# Altium PCB PCA_0008_USB_REV_B.PcbDoc
Units mm, origin at the board's own origin, x right, y up, seen from the top; angles counter-clockwise.
Board outline 15 x 21 mm, 2 copper layers (Top Layer, Bottom Layer), stack 1.671 mm thick; 9 components, 9 nets, 32 pads, 5 vias.
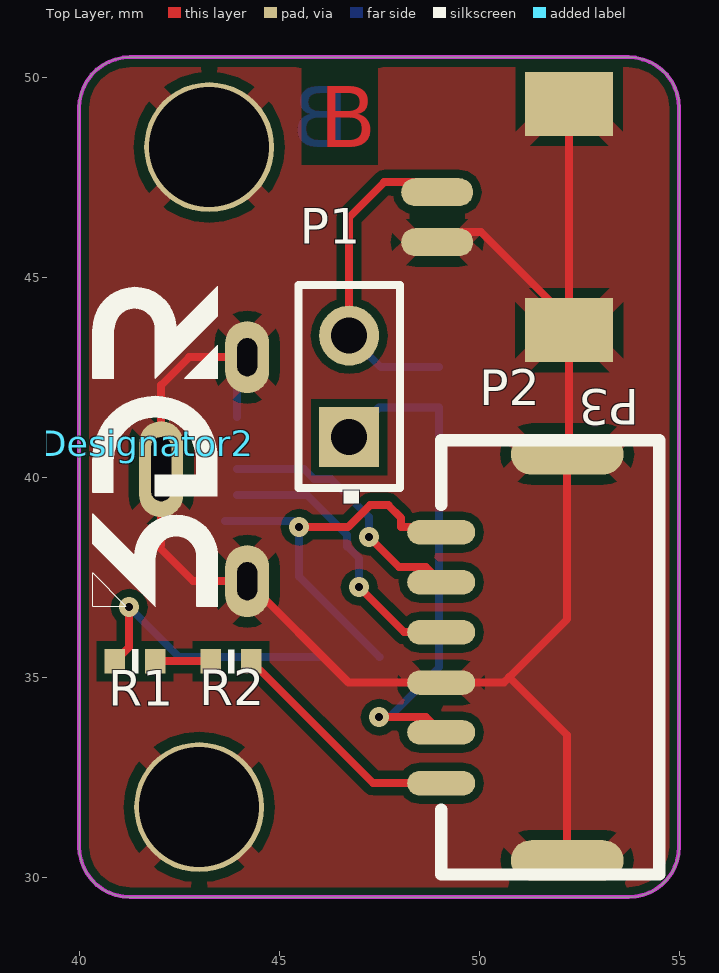
[diagram p0: Top Layer view]
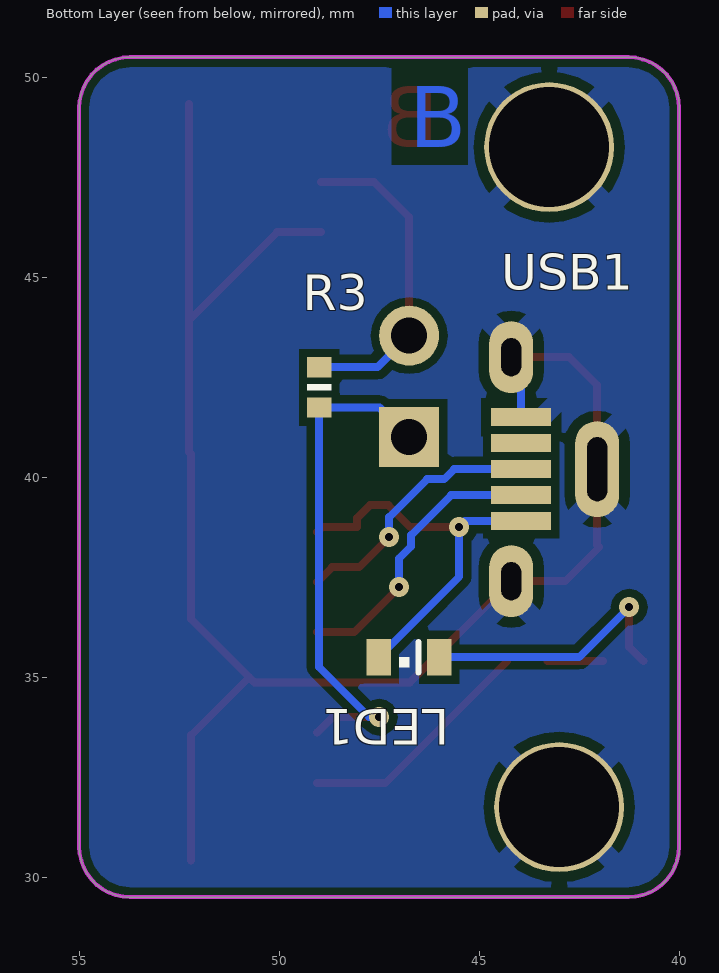
[diagram p1: Bottom Layer view, seen from below]
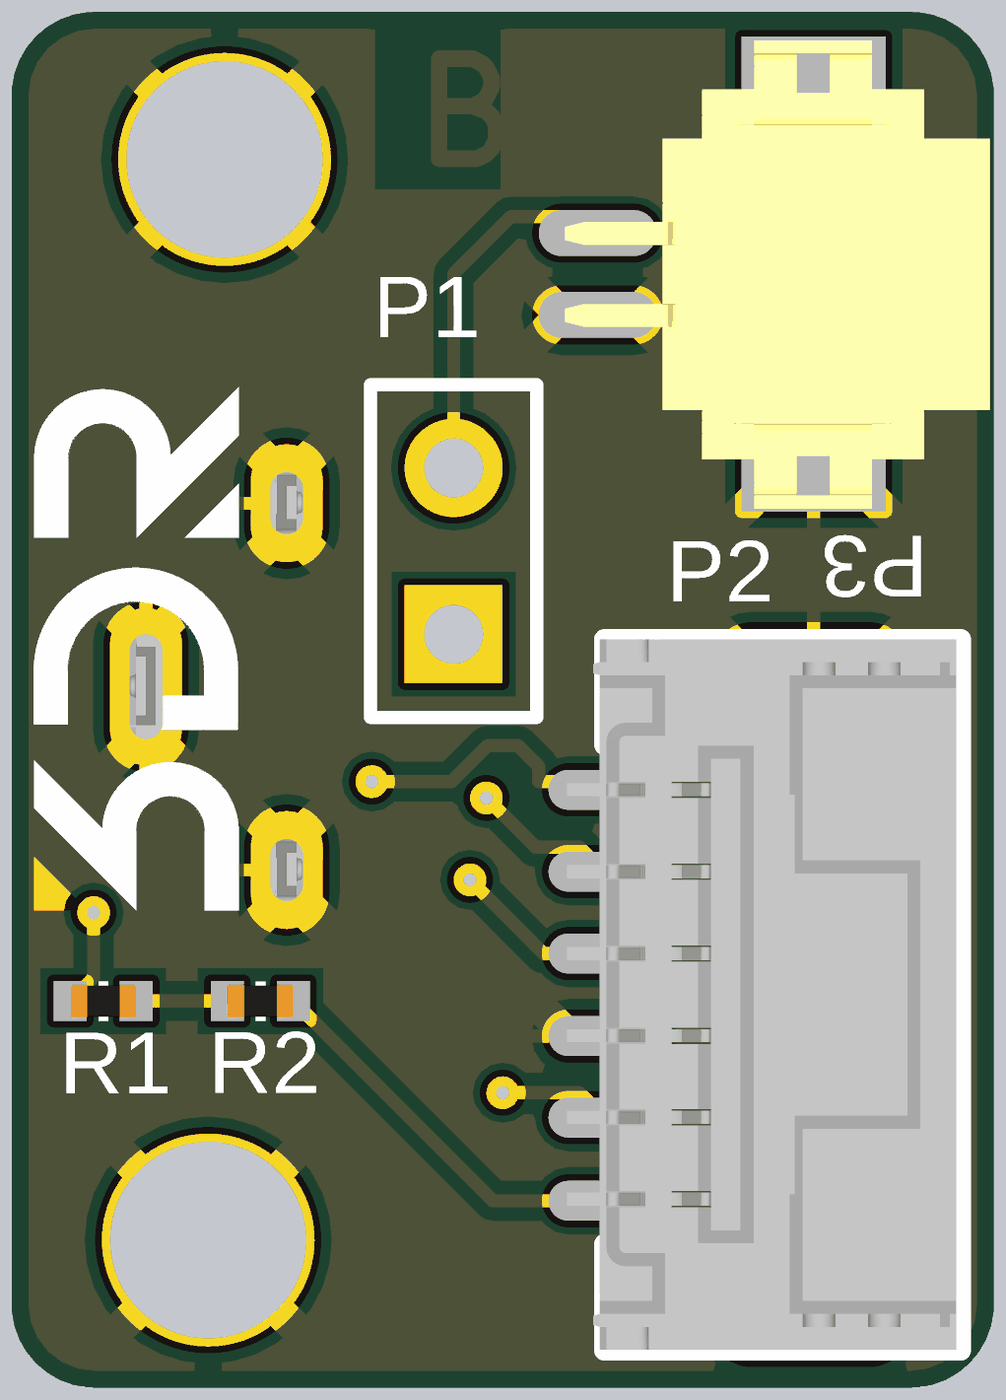
[diagram p2: 3D render of the assembled board from above, using the file's embedded part models]

## Layer stack, top to bottom
Top Solder: solder mask 0.0102, Solder Resist, Dk 3.5
Top Layer: signal copper 0.0356
Dielectric 1: dielectric 1.6, FR-4, Dk 4.8
Bottom Layer: signal copper 0.0356
Bottom Solder: solder mask 0.0102, Solder Resist, Dk 3.5

## Board outline
40,30.77 40,49.23 cw(c41.27,49.23) 41.27,50.5 53.73,50.5 cw(c53.73,49.23) 55,49.23 55,30.77 cw(c53.73,30.77) 53.73,29.5 41.27,29.5 cw(c41.27,30.77)

## Design rules (kind name [scope] priority, off if disabled: settings)
Clearance [All] p1: gap=0.2
PolygonConnect [All] p1: connectstyle=Relief reliefconductorwidth=0.5 reliefentries=4 polygonreliefangle="45 Angle" airgapwidth=0.254
RoutingVias [All] p1: holewidth=0.2 width=0.5 viastyle="Through Hole" minholewidth=0.2 minwidth=0.5 maxholewidth=0.711 maxwidth=1.27
SolderMaskExpansion [All] p1: expansion=0.102
UnpouredPolygon [All] p1: allowunpoured=FALSE
Width [All] p1: maxlimit=2 minlimit=0.127 preferedwidth=0.2
29 further rules are at their usual default settings.

## Components (designator, comment, footprint, x,y, rotation, side; value= is the part's Value field where it differs from the comment)
Designator2 "Comment" 3DR_SMALLER 41.696,40.85 r90 top
LED1 "AMBER" 0603-LED 46.75,35.5 r0 bottom
P1 "Header 2" HDR1X2 46.75,41 r90 top
P2 "CLICKMATE_1.25_6" CLICKMATE_V6 54.5,35.5 r270 top
P3 "DF13A-2P-1.25H(20)" DF13A-2P-1.25H(20) 52.25,46.5 r270 top
R1 "220R" 0402-RES 41.4,35.4 r180 top
R2 "220R" 0402-RES 43.8,35.4 r180 top
R3 "220R" 0402-RES 49,42.25 r270 bottom
USB1 "MICRO USB B, BOTTOM MOUNT" USB_10513300111051330011_Vert 44.2,40.2 r90 bottom

## Footprints (in the part's own frame and the unit in brackets; to place one, negate y for a bottom-side part, rotate by r counter-clockwise, add the part's x,y. Pads: shape width x height; smd on the part's side, far side on the other; paste and mask are expansions set on the pad)
3DR_SMALLER [mm]
  silkscreen extent -4.07,-1.77 3.93,1.36
0402-RES [mil] "0402-RES"
  rect 20x24 smd: P$1(-19.68,0) P$2(20,0)
  silkscreen extent -3,-12 3,12, body extent -20,-10 20,10, height 20
0603-LED [mil]
  rect 24x36 smd: A(30,0) C(-29.53,0)
  silkscreen extent -9,-15 10,15
CLICKMATE_V6 [mil]
  rrect100% 24x67 smd: 1(-123.03,-214.57) 2(-73.82,-214.57) 3(-24.61,-214.57) 4(25,-214.57) 5(74,-214.57) 6(124,-214.57)
  rrect100% 40x111 smd: GND(-199.8,-90.55) GND(200,-90.55)
  silkscreen extent -214,-215 214,0, body extent -214,-237 214,-3, height 179
DF13A-2P-1.25H(20) [mm]
  oval 0.7x1.8 smd: 1(-0.625,-3.3) 2(0.625,-3.3)
  rect 1.6x2.2 smd: GND(-2.825,0) GND(2.825,0)
  body extent -3.57,-3.81 3.58,2.69, height 3.68
HDR1X2 [mm] "Connector; Header; 2 Position"
  rect 1.5x1.5 hole 0.9: 1(0,0)
  round 1.5 hole 0.9: 2(2.54,0)
  silkscreen extent -1.27,-1.27 3.81,1.27
USB_10513300111051330011_Vert [mm]
  rect 0.45x1.5 smd: 1(-1.3,-0.25) 2(-0.65,-0.25) 3(0,-0.25) 4(0.65,-0.25) 5(1.3,-0.25)
  oval 1.8x1.1 hole 0.5 slot 0.95 at 0 deg: GND(-2.8,0) GND(2.8,0)
  oval 2.4x1.1 hole 0.5 slot 1.6 at 0 deg: GND(0,-2.15)
  body extent -4.01,-3.3 4.01,1.15, height 7.46

## Part data
LED1: library part LED0603
P1: "Header, 2-Pin"
R1 R2 R3: library part RESISTOR0402-RES
USB1: library part MOLEX-1051330011-VERT

## Free pads (board coordinates)
  round 3.25 hole 3: 0(43,31.75) 1(43.25,48.25)

## Via types
v1: diameter 0.5, hole 0.2, Top Layer to Bottom Layer, 5 vias

## Nets (pads, with @x,y where several pads share a name; then routed paths per layer and width w, separated by ;. In a path a pad name is that pad's centre, name@x,y a point inside that pad or via, vN(x,y) a via of type N, cw(c..) or ccw(c..) an arc to the next point about the centre after c; other vN are vias at no path point)
BUZZER_OUT: P1.1 P2.5 R3.P$2 | length 12.8
  Top Layer w0.2: v1(47.5,34) 48.67,34 P2.5
  Bottom Layer w0.2: P1.1 47.492,41.742 R3.P$2 49,35.25 47.75,34 v1(47.5,34)
F\M\U\-\L\E\D\_\A\M\B\E\R\: P2.6 R2.P$1 | length 6
  Top Layer w0.2: R2.P$1 47.35,32.35 P2.6
GND: P2.4 P2.GND P3.2 P3.GND pad.0 pad.1 USB1.5 USB1.GND | length 42.7
  Top Layer w0.2: USB1.GND@44.2,43 42.75,43 42.05,42.3 42.05,40.2 42.05,38.3 42,38.25 42.85,37.4 44.2,37.4 46.735,34.865 P2.4 50.615,34.865 50.75,35 ; P3.2@48.95,46.125 50.05,46.125 P3.GND@52.25,43.925 ; P2.GND@52.2,30.42 52.2,33.55 50.75,35 ; P3.GND@52.25,49.325 P3.GND@52.25,43.925 ; 50.75,35 52.2,36.45 52.2,40.575 52.25,40.625 52.25,43.675 P3.GND@52.25,43.925
  Bottom Layer w0.2: USB1.5 43.95,42.75 USB1.GND@44.2,43
NetLED1_C: LED1.C R1.P$2 | length 6.8
  Top Layer w0.2: R1.P$2 41.25,35.758 v1(41.25,36.75)
  Bottom Layer w0.2: v1(41.25,36.75) 42.5,35.5 LED1.C
NetP1_2: P1.2 P3.1 R3.P$1 | length 8.1
  Top Layer w0.2: P1.2 46.75,46.5 47.625,47.375 P3.1@48.95,47.375
  Bottom Layer w0.2: P1.2 47.54,42.75 R3.P$1
NetR1_P$1: R1.P$1 R2.P$2 | length 1.4
  Top Layer w0.2: R1.P$1 R2.P$2
OTG_DM1: P2.3 USB1.2 | length 7.1
  Top Layer w0.2: v1(47,37.25) 48.125,36.125 P2.3
  Bottom Layer w0.2: USB1.2 45.7,39.55 46.7,38.55 46.7,38.272 47,37.972 v1(47,37.25)
OTG_DP1: P2.2 USB1.3 | length 6.6
  Top Layer w0.2: v1(47.25,38.5) 48,37.75 48.675,37.75 P2.2
  Bottom Layer w0.2: USB1.3 45.626,40.2 45.876,39.95 46.3,39.95 47.25,39 v1(47.25,38.5)
VBUS: LED1.A P2.1 USB1.1 | length 10.2
  Top Layer w0.2: v1(45.5,38.75) 46.722,38.75 47.272,39.3 47.728,39.3 48.05,38.978 48.05,38.75 48.925,38.75 P2.1
  Bottom Layer w0.2: USB1.1@43.65,38.9 USB1.1 45.35,38.9 v1(45.5,38.75) 45.5,37.512 LED1.A
pads on no net: USB1.4

## Polygon pours and split planes (outlines as drawn)
GND on Top Layer "Top Layer-No Net" (solid, remove dead copper, pour order 5): 38.25,52.25 38.5,52 57,52 57,25.25 56.25,24.5 35.75,24.5
GND on Bottom Layer "Top Layer-No Net" (solid, remove dead copper, pour order 4): 38.25,52.25 38.5,52 57,52 57,25.25 56.25,24.5 35.75,24.5

## Keep-outs
Keep-Out Layer:
  the board outline again, w0.1

## Other copper
Top Layer:
  text "B" at 46,48.25 h1.52
Bottom Layer:
  text "B" at 46.75,48.25 h1.52

## Silkscreen, mask and mechanical layers (free items; w line width, h text height)
Mechanical 1:
  the board outline again, w0.254
Mechanical 16:
  drawing of 162 lines, arcs and shapes, not listed
  text "Layer" at 57.774,56.714 h1.52
  text "Name" at 64.406,56.714 h1.52
  text "Material" at 76.992,56.714 h1.52
  text "Thickness" at 88.33,56.714 h1.52
  text "Constant" at 97.688,56.714 h1.52
  text "Board Layer Stack" at 106.368,56.714 h1.52
  text "1" at 57.774,53.666 h1.52
  text "Top Paste" at 64.406,53.666 h1.52
  text "2" at 57.774,50.618 h1.52
  text "Top Overlay" at 64.406,50.618 h1.52
  text "3" at 57.774,47.57 h1.52
  text "Top Solder" at 64.406,47.57 h1.52
  text "Solder Resist" at 76.992,47.57 h1.52
  text "0.010mm" at 88.33,47.57 h1.52
  text "3.5" at 97.688,47.57 h1.52
  text "4" at 57.774,44.522 h1.52
  text "Top Layer" at 64.406,44.522 h1.52
  text "Copper" at 76.992,44.522 h1.52
  text "0.036mm" at 88.33,44.522 h1.52
  text "5" at 57.774,41.474 h1.52
  text "Dielectric 1" at 64.406,41.474 h1.52
  text "FR-4" at 76.992,41.474 h1.52
  text "1.600mm" at 88.33,41.474 h1.52
  text "4.8" at 97.688,41.474 h1.52
  text "6" at 57.774,38.426 h1.52
  text "Bottom Layer" at 64.406,38.426 h1.52
  text "Copper" at 76.992,38.426 h1.52
  text "0.036mm" at 88.33,38.426 h1.52
  text "7" at 57.774,35.378 h1.52
  text "Bottom Solder" at 64.406,35.378 h1.52
  text "Solder Resist" at 76.992,35.378 h1.52
  text "0.010mm" at 88.33,35.378 h1.52
  text "3.5" at 97.688,35.378 h1.52
  text "8" at 57.774,32.33 h1.52
  text "Bottom Overlay" at 64.406,32.33 h1.52
  text "9" at 57.774,29.282 h1.52
  text "Bottom Paste" at 64.406,29.282 h1.52